# Altium PCB DTVersion.PcbDoc
Units mil, origin at the board's own origin, x right, y up, seen from the top; angles counter-clockwise.
Board outline 6000 x 4000 mil, 2 copper layers (Top Layer, Bottom Layer); 15 components, 50 nets, 108 pads, 0 vias.
Unrouted connection lines stored in the file: 37.
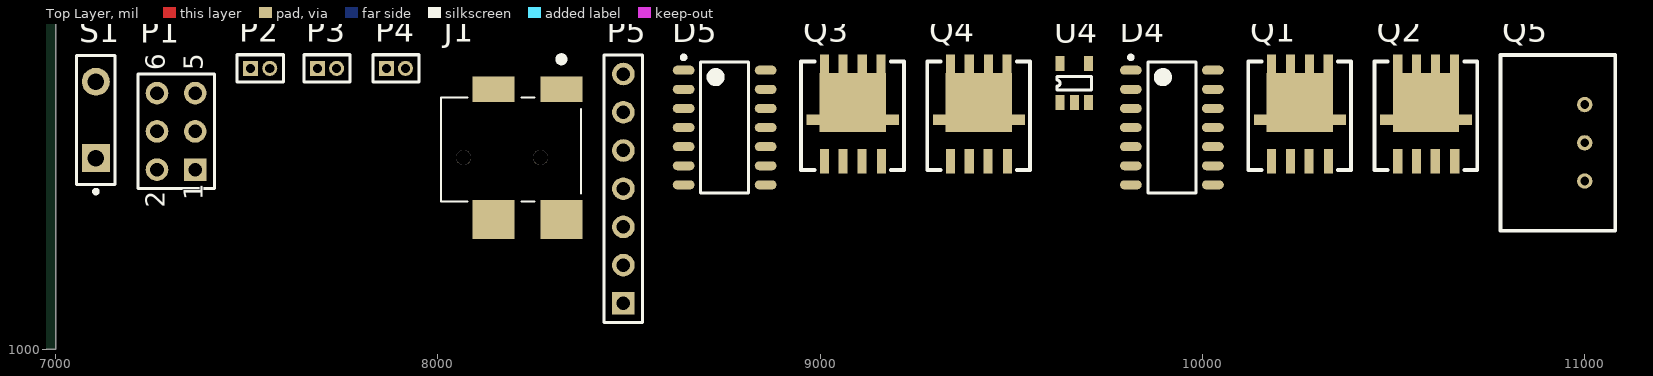
[diagram p0: Top Layer view]
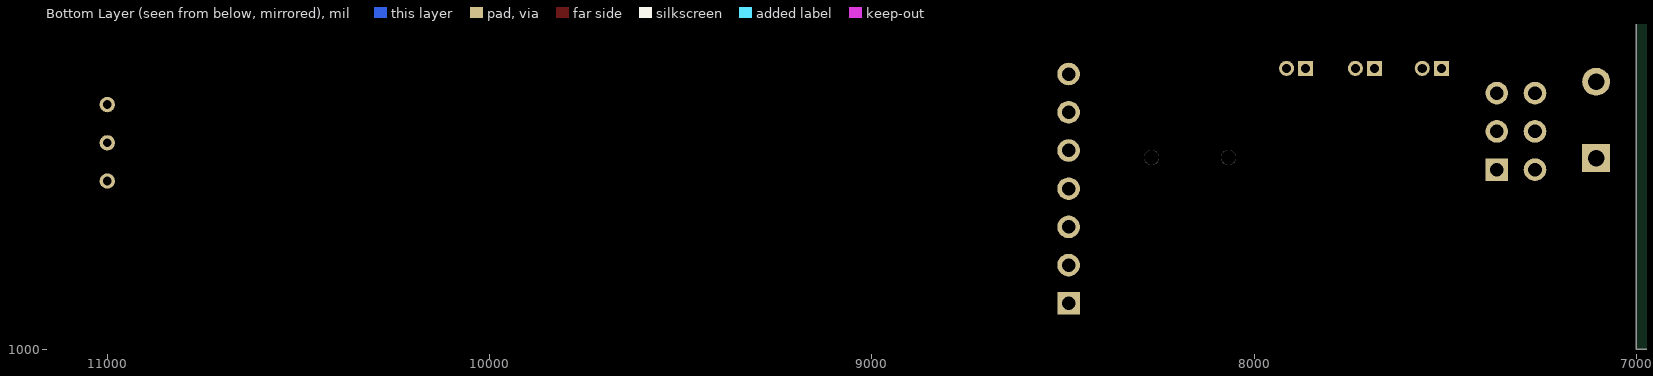
[diagram p1: Bottom Layer view, seen from below]

## Layer stack, top to bottom
Top Solder: solder mask 0.4, Solder Resist, Dk 3.5
Top Layer: signal copper 1.4
Dielectric 1: dielectric 12.6, FR-4, Dk 4.8
Bottom Layer: signal copper 1.4
Bottom Solder: solder mask 0.4, Solder Resist, Dk 3.5

## Board outline
1000,1000 7000,1000 7000,5000 1000,5000

## Design rules (kind name [scope] priority, off if disabled: settings)
Clearance [All] p1: gap=10 ignorepadtopadclearanceinfootprint=FALSE except(0: Arc-Hole Track-Hole SMDPad-Hole THPad-Hole Via-Hole Fill-Hole Poly-Hole Region-Hole Text-Hole)
PolygonConnect [All] p1: connectstyle=Relief reliefconductorwidth=10 reliefentries=4 polygonreliefangle="90 Angle" airgapwidth=10
RoutingVias [All] p1: holewidth=28 width=50 viastyle="Through Hole" minholewidth=28 minwidth=50 maxholewidth=28 maxwidth=50
SolderMaskExpansion [All] p1: expansion=4 istentingtop=FALSE
Width [All] p1: maxlimit=10 minlimit=10 preferedwidth=10
30 further rules are at their usual default settings.

## Components (designator, comment, footprint, x,y, rotation, side; value= is the part's Value field where it differs from the comment)
D4 "IRS21834" IRS21834 9920,1580 r0 top
D5 "IRS21834" IRS21834 8750,1580 r0 top
J1 "1mm DC Jack SMT" CUI_PJ-014CH-SMT-TR_PJ-014CH-SMT-TR 8195,1510 r0 top
P1 "ISP Programmer" HDR2X3 7365,1470 r90 top
P2 "Thermistor Header" MHDR1X2 7510,1735 r0 top
P3 "Thermistor Header" MHDR1X2 7685,1735 r0 top
P4 "Thermistor Header" MHDR1X2 7865,1735 r0 top
P5 "BLE Headers" HDR1X7 8485,1120 r90 top
Q1 "NMOS" BSC072N08NS5ATMA1_modified_v2 10255,1615 r0 top
Q2 "NMOS" BSC072N08NS5ATMA1_modified_v2 10585,1615 r0 top
Q3 "NMOS" BSC072N08NS5ATMA1_modified_v2 9085,1615 r0 top
Q4 "NMOS" BSC072N08NS5ATMA1_modified_v2 9415,1615 r0 top
Q5 "SRH05S12" SRH05S12 11000,1540 r90 top
S1 "SW-PB" SPST-2 7105,1600 r90 top
U4 "AP2210K-3.3TRG1" "AP2210K-3.3TRG1 SOT23-5" 9665,1645 r0 top

## Footprints (in the part's own frame and the unit in brackets; to place one, negate y for a bottom-side part, rotate by r counter-clockwise, add the part's x,y. Pads: shape width x height; smd on the part's side, far side on the other; paste and mask are expansions set on the pad)
"AP2210K-3.3TRG1 SOT23-5" [mm] "SOT143-4 as used in AP2210K-3.3TRG1"
  round 0.2 on Top Overlay: 1(-1.5,0.75)
  rect 0.6x1 smd: 1(-0.95,0) 2(0,0) 3(0.95,0) 4(0.95,2.6) 5(-0.95,2.6)
  silkscreen extent -1.15,0.85 1.15,1.75, body extent -1.46,0.13 1.46,2.47, height 1
BSC072N08NS5ATMA1_modified_v2 [mil]
  rect 23.94x65 smd: 1(-74,-123) 1(-25,-123) 1(24,-123) 4(75,-123) 8(-74,123) 8(-25,123) 8(25,123) 8(74,123)
  rect 65x27.87 smd: 8(-88,-15) 8(88,-15)
  rect 173.62x153.54 smd: 8(0,30.26)
  silkscreen extent -135,-146 134,138, body extent -106,-127 107,127, height 40
CUI_PJ-014CH-SMT-TR_PJ-014CH-SMT-TR [mm]
  rect 2.8x1.7 smd: 1(-1.25,4.325) 1(3.25,4.325)
  rect 2.8x2.6 smd: 2(-1.25,-4.325) 3(3.25,-4.325)
  round 1 hole 1 unplated: None(-3.25,-0.225) None(1.853,-0.225)
  silkscreen extent -4.75,-3.13 4.55,6.51, body extent -4.7,-5 4.6,4.6, height 5.2
HDR1X7 [mm] "Connector; Header; 7 Position"
  rect 1.5x1.5 hole 0.9: 1(0,0)
  round 1.5 hole 0.9: 2(2.54,0) 3(5.08,0) 4(7.62,0) 5(10.16,0) 6(12.7,0) 7(15.24,0)
  silkscreen extent -1.27,-1.27 16.51,1.27
HDR2X3 [mm] "Connector; Header; 3x2 Position"
  rect 1.5x1.5 hole 0.9: 1(0,0)
  round 1.5 hole 0.9: 2(0,2.54) 3(2.54,0) 4(2.54,2.54) 5(5.08,0) 6(5.08,2.54)
  silkscreen extent -1.27,-1.27 6.35,3.81
IRS21834 [mm] "IRS21834 HALF-BRIDGE 600V FET DRIVER"
  oval 1.45x0.6 smd: 0(-2.725,-3.81) 1(-2.725,3.81) 2(-2.725,2.54) 3(-2.725,0) 4(-2.725,1.27) 5(-2.725,-2.54) 6(-2.725,-1.27) 7(2.725,0) 8(2.725,2.54) 9(2.725,1.27) 14(2.725,-3.81) 14(2.725,-2.54) 14(2.725,-1.27) 14(2.725,3.81)
  silkscreen extent -2.85,-4.35 1.6,4.78, body extent -3,-4.35 3,4.35, height 1.75
MHDR1X2 [mm] "Connector; Header; 2 Position"
  rect 1x1 hole 0.6: 1(0,0)
  round 1 hole 0.6: 2(1.27,0)
  silkscreen extent -0.9,-0.9 2.17,0.9
SPST-2 [mm] "Switch; 2 Leads"
  rect 1.85x1.85 hole 1.1: 1(-2.54,0)
  round 1.85 hole 1.1: 2(2.54,0)
  silkscreen extent -4.89,-1.27 4.28,1.27
SRH05S12 [mil] "DC-DC Regulator 12V Out TH"
  round 40 hole 23: 0(-100,0) 1(0,0) 2(100,0)
  silkscreen extent -230,-80 230,220, body extent -230,-80 230,220, height 380

## Part data
D4 D5: "IRS21834 HALF-BRIDGE 600V FET DRIVER", ComponentLink1Description=Datasheet, ComponentLink1URL=https://www.infineon.com/dgdl/irs2183.pdf?fileId=5546d462533600a401535676d20c27d8
J1: "CONN PWR JACK 1X3.4MM SOLDER", Manufacturer="CUI Devices", Manufacturer Part Number=PJ-014CH-SMT-TR, Package=CUI_PJ-014CH-SMT-TR_PJ-014CH-SMT-TR, Supplier Part Number 1=CP-014CHPJCT-ND, Part Description="CONN PWR JACK 1X3.4MM SOLDER", Supplier 1=Digi-Key, Supplier 2=Mouser, Supplier Part Number 2=490-PJ-014CH-SMT-TR, Type="Surface mount"
P1: library part "Header 3X2", "Header, 3-Pin, Dual row", LatestRevisionDate=17-Jul-2002, LatestRevisionNote="Re-released for DXP Platform.", Publisher="Altium Limited"
P2 P3 P4: library part MHDR1X2, "Header, 2-Pin", LatestRevisionDate=17-Jul-2002, LatestRevisionNote="Re-released for DXP Platform.", Publisher="Altium Limited"
P5: library part "Header 7", "Header, 7-Pin", LatestRevisionDate=17-Jul-2002, LatestRevisionNote="Re-released for DXP Platform.", Publisher="Altium Limited"
Q1 Q2 Q3 Q4: library part "NMOS OptiMOS BSC072N08NS5ATMA1", "MOSFET N-CH 80V 74A 8TDSON", Manufacturer="Infineon Technologies", MPN=BSC072N08NS5ATMA1, Supplier Part Number 1=2725812, Part Description="MOSFET N-CH 80V 74A 8TDSON", Supplier 1=Element14, Supplier 2=Digi-Key, Supplier 3=Mouser, Supplier Part Number 2=BSC072N08NS5ATMA1CT-ND, Supplier Part Number 3=726-BSC072N08NS5ATMA, Type="Surface mount"
Q5: "DC-DC Regulator 12V Out TH", ComponentLink1Description=Datasheet, ComponentLink1URL=https://www.xppower.com/portals/0/pdfs/SF_SRH05.pdf
S1: "Switch", LatestRevisionDate=17-Jul-2002, LatestRevisionNote="Re-released for DXP Platform.", PackageDescription="Switch; 2 Leads", PackageReference=SPST-2, Published=24-Mar-1999, Publisher="Altium Limited"

## Nets (pads, with @x,y where several pads share a name; then routed paths per layer and width w, separated by ;. In a path a pad name is that pad's centre, name@x,y a point inside that pad or via, vN(x,y) a via of type N, cw(c..) or ccw(c..) an arc to the next point about the centre after c; other vN are vias at no path point)
3V3: P1.2 P5.1 U4.5
12V: D4.7 D5.7 Q5.2 U4.1@9627.6,1645 U4.3
50V: Q5.0
D1: Q1.1 Q3.8
D2: Q2.1 Q4.8
GND: D4.3 D4.4 D4.5 D5.3 D5.4 D5.5 J1.2 J1.3 P1.6 P2.2 P3.2 P4.2 P5.2 Q3.1 Q4.1 Q5.1 S1.1 U4.2
INP: J1.1
IP-: Q1.8 Q2.8
Lpt1: 
Lpt2: 
NetC1A_2: 
NetC1B_2: 
NetC22_1: 
NetC23_1: 
NetC24_2: D4.1 D4.2
NetC25_2: D5.1 D5.2
NetC26_1: 
NetC29_1: 
NetC30_2: P1.5
NetC31_2: U4.4
NetC32_2: S1.2
NetD1_1: 
NetD4_6: D4.6
NetD4_12: 
NetD5_6: D5.6
NetD5_12: 
NetP1_1: P1.1
NetP1_3: P1.3
NetP1_4: P1.4
NetP2_1: P2.1
NetP3_1: P3.1
NetP4_1: P4.1
NetP5_3: P5.3
NetP5_4: P5.4
NetP5_5: P5.5
NetP5_6: P5.6
NetP5_7: P5.7
NetQ1_4: Q1.4
NetQ2_4: Q2.4
NetQ3_4: Q3.4
NetQ4_4: Q4.4
NetR11_1: 
NetR13_2: 
NetR14_2: 
NetR15_2: 
NetR18_2: 
VB1: 
VB2: 
X1: 
X2: 
pads on no net: D4.0 D4.8 D4.9 D4.14 D5.0 D5.8 D5.9 D5.14 J1.None U4.1@9605.94,1674.53

## Text inside footprints (layer, text, board x,y; h text height)
P1: Top Overlay "6" at 7285,1730 h50 r90; Top Overlay "5" at 7385,1730 h50 r90; Top Overlay "2" at 7285,1370 h50 r90; Top Overlay "1" at 7385,1390 h50 r90